# Altium PCB Ada - Sensor - issue 4.0.PcbDoc
Units mm, origin at the board's own origin, x right, y up, seen from the top; angles counter-clockwise.
Board outline 61.85 x 43.35 mm, 2 copper layers (Top Layer, Bottom Layer), stack 1.571 mm thick; 77 components, 51 nets, 205 pads, 67 vias.
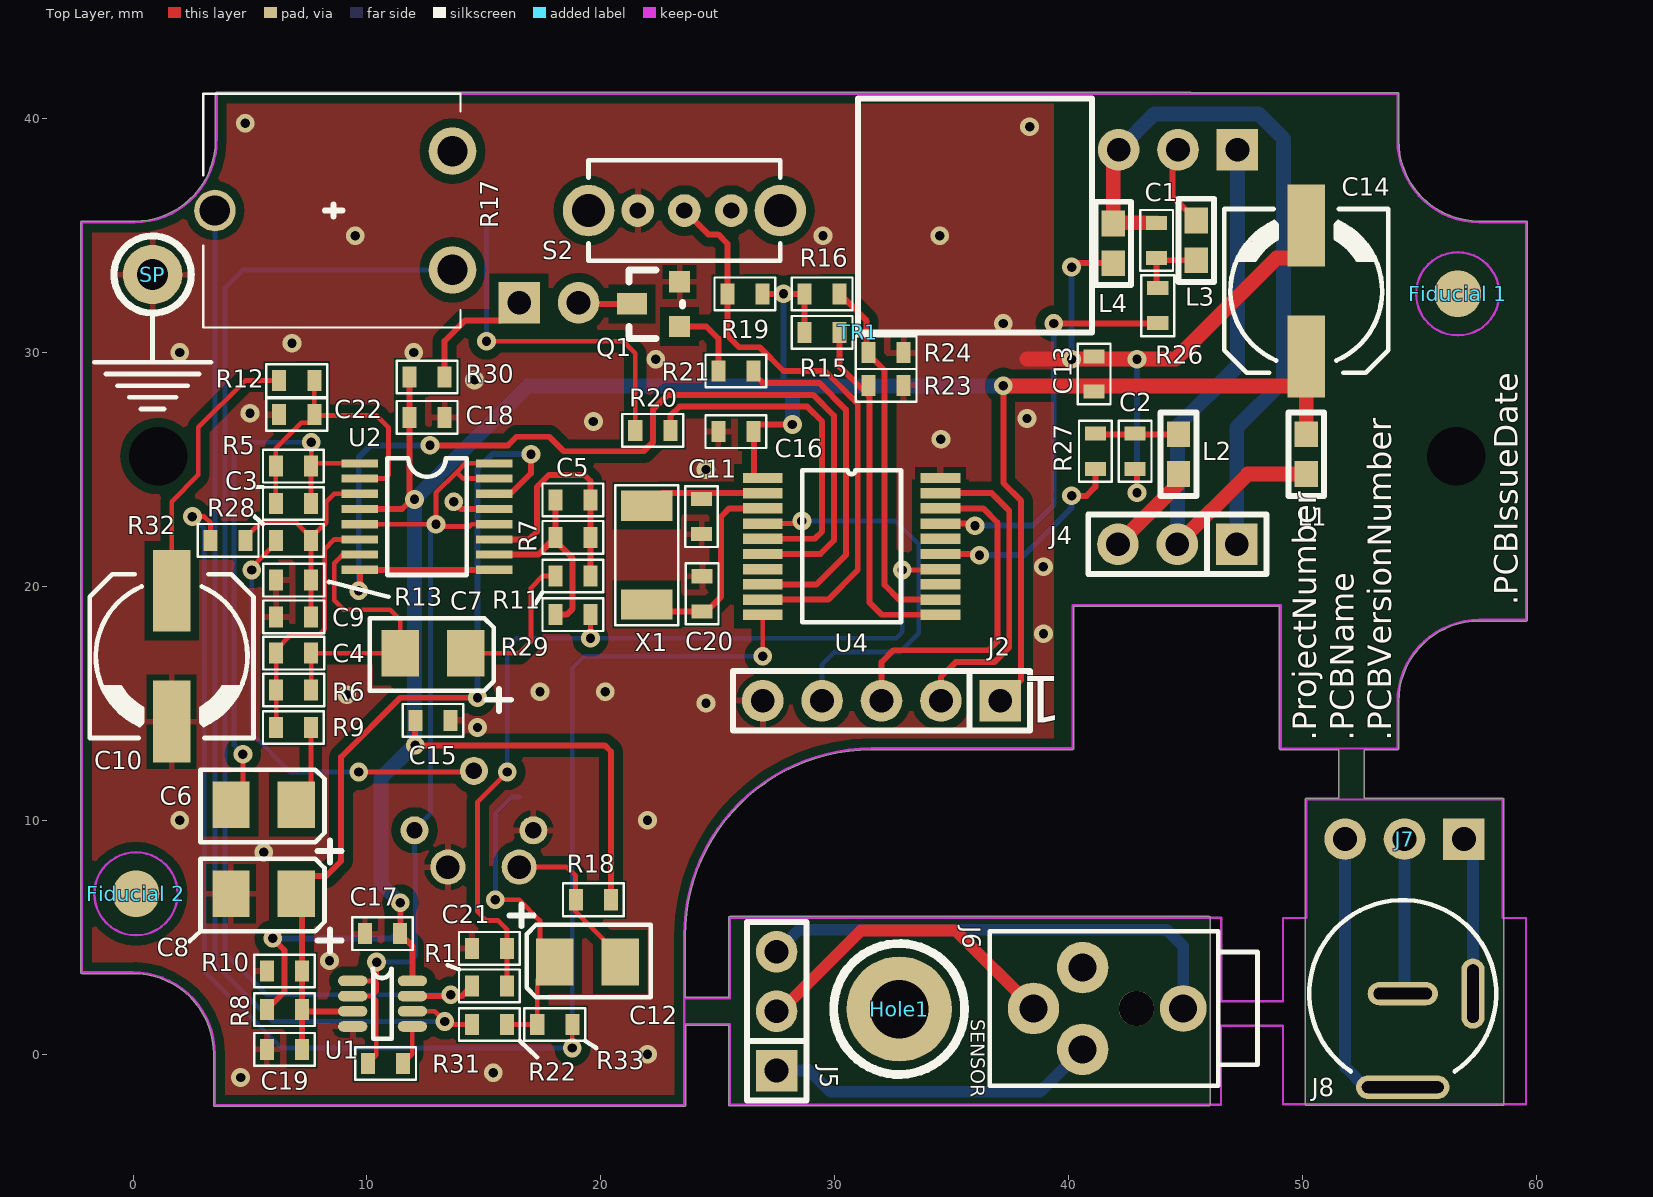
[diagram p0: Top Layer view]
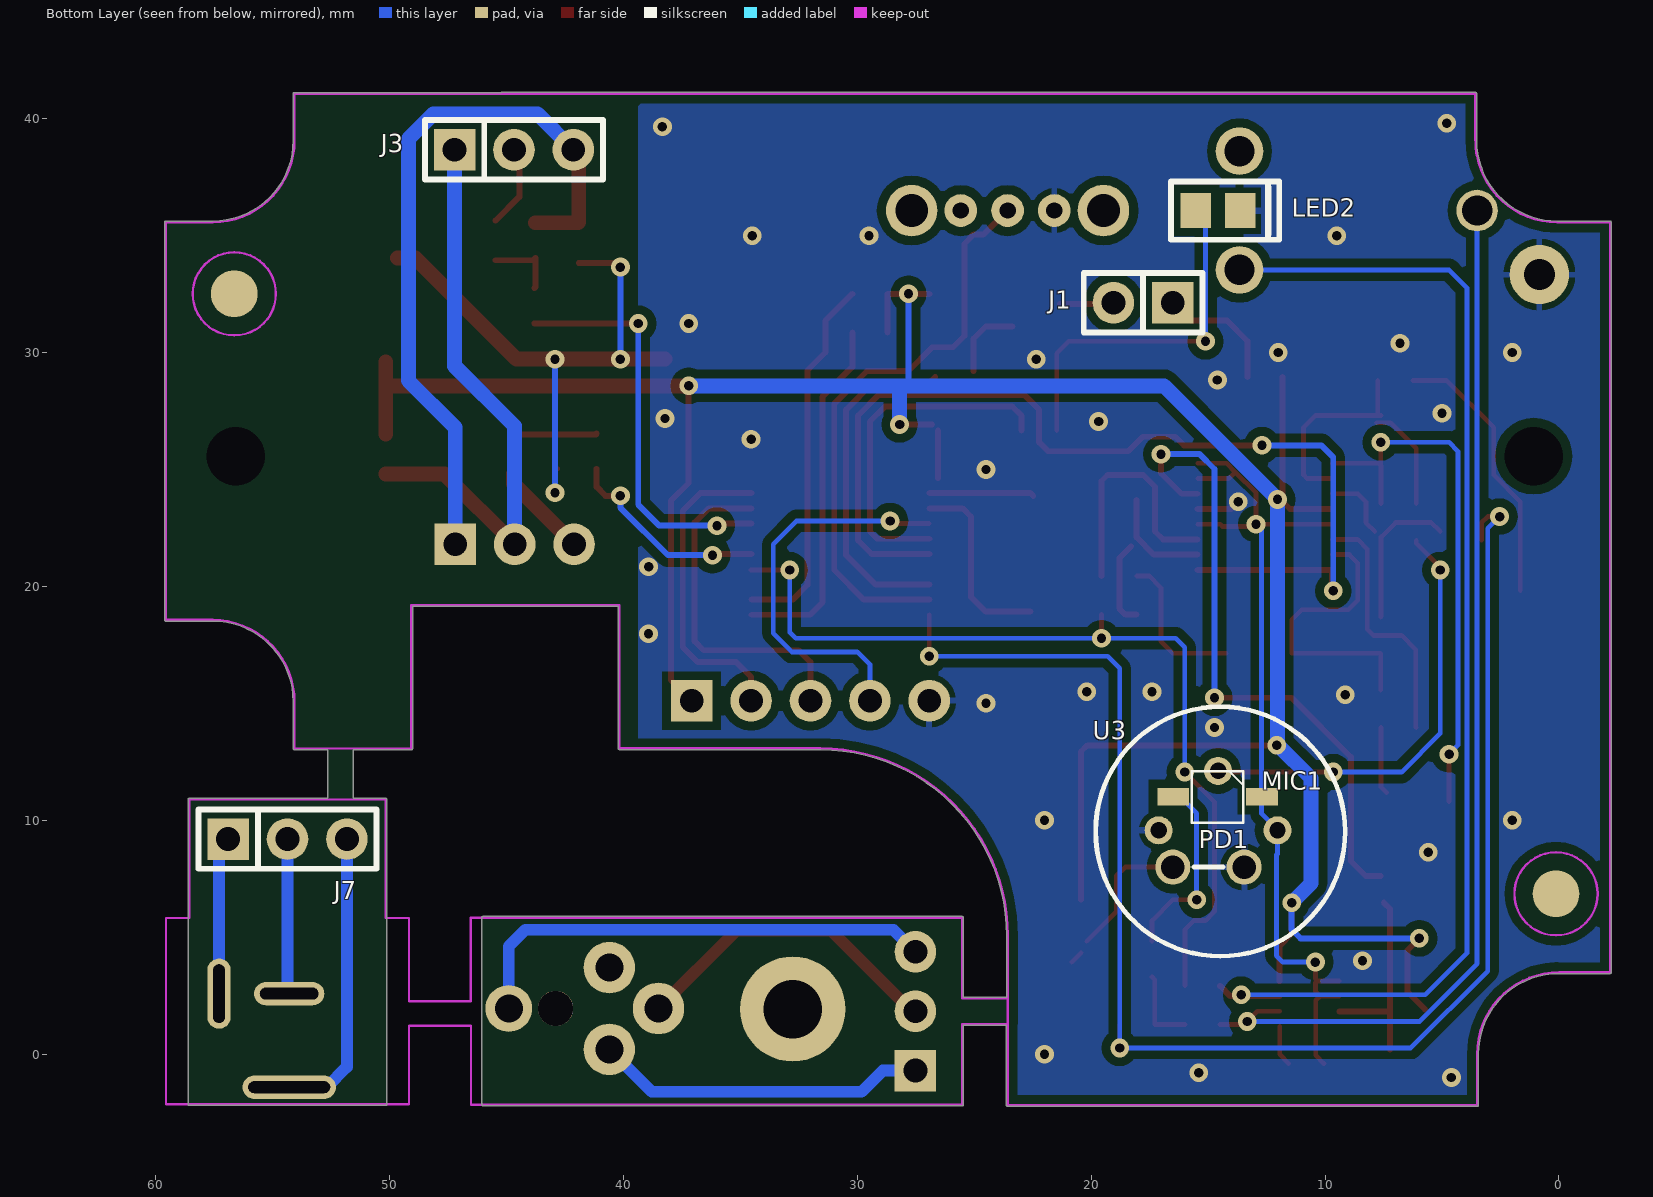
[diagram p1: Bottom Layer view, seen from below]
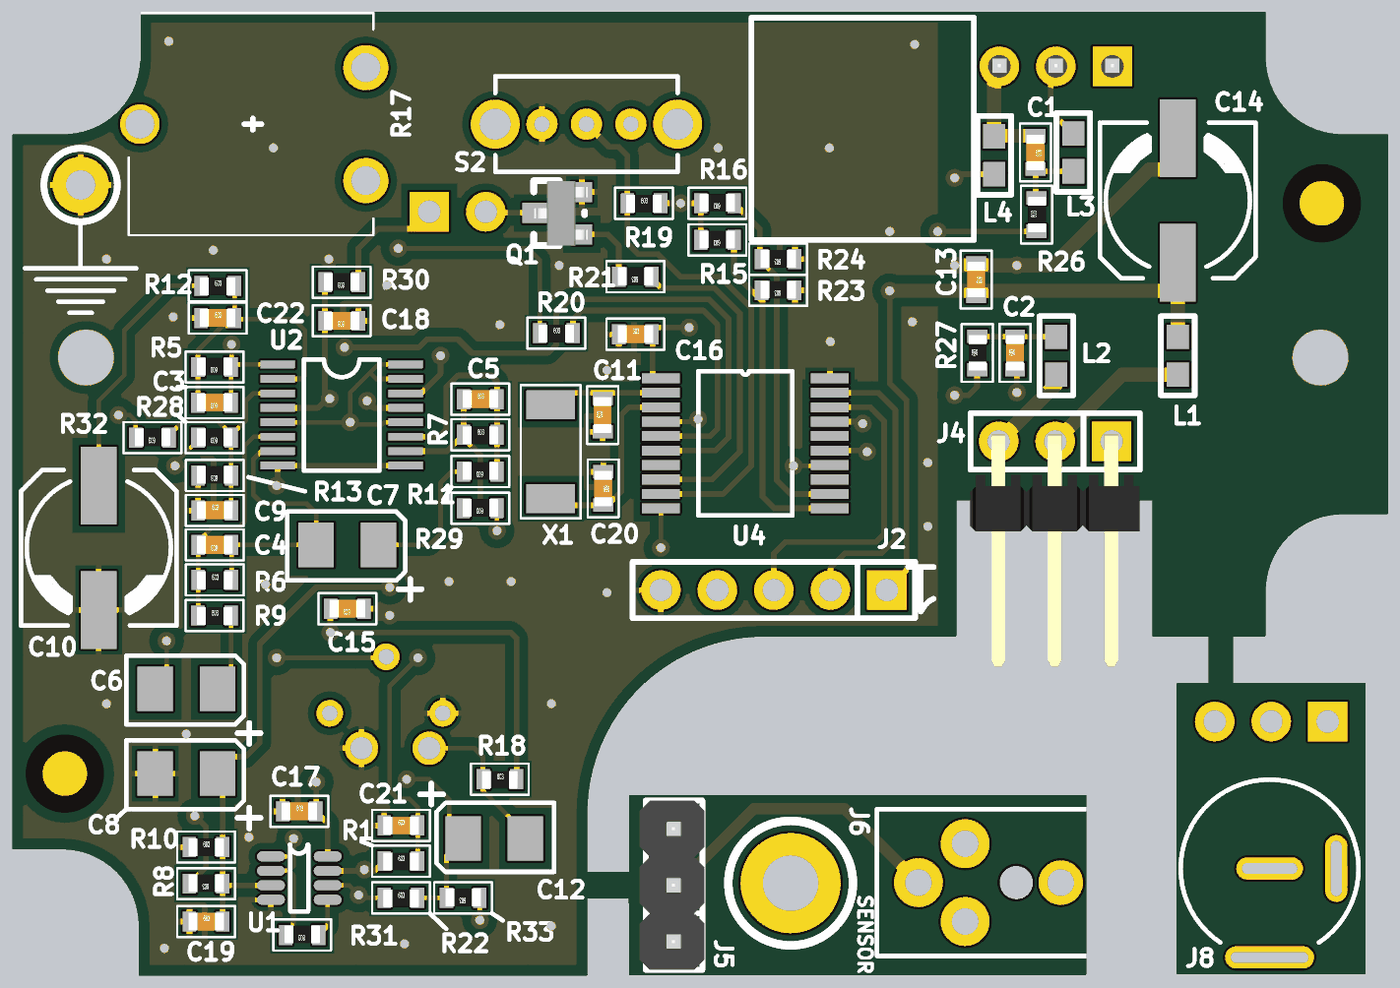
[diagram p2: 3D render of the assembled board from above, using the file's embedded part models]

## Layer stack, top to bottom
Top Solder: solder mask 0.0102, Solder Resist, Dk 3.5
Top Layer: signal copper 0.0356
Dielectric1: dielectric 1.5, FR-4, Dk 4.8
Bottom Layer: signal copper 0.0356
Bottom Solder: solder mask 0.0102, Solder Resist, Dk 3.5

## Board outline
3.45,-2.181 3.45,0 cw(c3.5,0) 3.45,0.001 ccw(c0,0) 0,3.45 -2.181,3.45 cw(c-2.181,3.5) -2.231,3.5 -2.231,35.569 cw(c-2.181,35.569) -2.181,35.62 0.069,35.62 ccw(c0.069,39.069) 3.519,39.069 cw(c3.569,39.069) 3.526,39.096 3.526,41.073 cw(c3.577,41.073) 3.577,41.123 45.206,41.123 cw(c45.206,41.073) 45.225,41.12 54.069,41.12 cw(c54.069,41.069) 54.12,41.069 54.12,39.069 cw(c54.069,39.069) 54.12,39.069 ccw(c57.569,39.069) 57.569,35.62 59.569,35.62 cw(c59.569,35.569) 59.62,35.569 59.62,18.569 cw(c59.569,18.569) 59.569,18.519 57.569,18.519 cw(c57.569,18.569) 57.569,18.519 cw(c57.569,15.069) 57.569,18.519 ccw(c57.569,15.069) 54.12,15.07 cw(c54.069,15.069) 54.12,15.069 54.12,13.069 cw(c54.069,13.069) 54.069,13.019 52.65,13.019 52.65,10.939 58.565,10.939 cw(c58.565,10.889) 58.615,10.889 58.615,-2.143 cw(c58.565,-2.143) 58.565,-2.193 50.2,-2.193 cw(c50.2,-2.143) 50.184,-2.191 cw(c50.168,-2.143) 50.118,-2.143 50.118,10.889 cw(c50.168,10.889) 50.168,10.939 51.55,10.939 51.55,13.019 49.069,13.019 cw(c49.069,13.069) 49.019,13.072 cw(c49.069,13.075) 49.019,13.075 49.019,19.15 40.22,19.15 40.22,13.075 cw(c40.169,13.075) 40.169,13.025 31.593,13.025 cw(c31.569,13.069) 31.569,13.019 ccw(c31.569,5.069) 23.62,5.069 23.62,2.442 25.469,2.442 25.469,5.838 cw(c25.52,5.838) 25.52,5.888 46,5.888 cw(c46,5.838) 46.05,5.838 46.05,-2.162 cw(c46,-2.162) 46,-2.212 25.52,-2.212 cw(c25.52,-2.162) 25.469,-2.162 25.469,1.234 23.624,1.234 23.624,-2.159 cw(c23.577,-2.177) 23.627,-2.177 cw(c23.577,-2.177) 23.577,-2.228 3.518,-2.228 cw(c3.5,-2.181)

## Design rules (kind name [scope] priority, off if disabled: settings)
Clearance Clearance_Plane [InPolygon] p1: gap=0.381 // Clearance to planes
Clearance [OnLayer('Keep-Out Layer') vs IsPad] p2: gap=0.1
Clearance Clearance_1 [All] p3: gap=0.15
ComponentClearance [All] p1 off: gap=0.04 collisioncheckmode=3 verticalgap=0.254 showdistances=FALSE
HoleSize [All] p1: absolutevalues=TRUE maxlimit=6.35 minlimit=0.025 maxpercent=80.000 minpercent=20.000
HoleSize Testpoint [All] p2: absolutevalues=TRUE maxlimit=2.54 minlimit=0.025 maxpercent=80.000 minpercent=20.000
HoleSize TestPointUsage [All] p3: absolutevalues=TRUE maxlimit=2.54 minlimit=0.025 maxpercent=80.000 minpercent=20.000
MinimumSolderMaskSliver [All] p1 off: minsoldermaskwidth=0.076
MinimumSolderMaskSliver SilkscreenOverComponentPads [All] p2 off: minsoldermaskwidth=0.254
PolygonConnect PolygonConnect_Via [IsVia] p1: connectstyle=Direct reliefconductorwidth=0.254 reliefentries=4 polygonreliefangle="90 Angle" airgapwidth=0.254 // Direct connect to vias
PolygonConnect [All] p2: connectstyle=Relief reliefconductorwidth=0.254 reliefentries=4 polygonreliefangle="90 Angle" airgapwidth=0.254
RoutingVias [All] p1: holewidth=0.4 width=0.8 viastyle="Through Hole" minholewidth=0.4 minwidth=0.8 maxholewidth=0.4 maxwidth=0.8
SilkToSilkClearance [All] p1 off: silktosilkclearance=0.254
SilkToSolderMaskClearance [IsPad] p1 off: minsilkscreentomaskgap=0.127 clearancetoexposedcopper=TRUE
SolderMaskExpansion [All] p1: expansion=0.102
UnpouredPolygon [All] p1: allowunpoured=FALSE
Width [All] p1: maxlimit=12.7 minlimit=0.203 preferedwidth=0.254
24 further rules are at their usual default settings.

## Classes and differential pairs
component class "TRI002 daugher board 3.1": J5 J6 J7 J8
component class "TRI002 sensor board issue 3.1": C1 C2 C3 C4 C5 C6 C7 C8 C9 C10 C11 C12 C13 C14 C15 C16 C17 C18 C19 C20 C21 C22 J1 J2 J3 J4 L1 L2 L3 L4 LED2 MIC1 PD1 Q1 R1 R5 R6 R7 R8 R9 R10 R11 R12 R13 R15 R16 R17 R18 R19 R20 R21 R22 R23 R24 R26 R27 R28 R29 R30 R31 R32 R33 S2 U1 U2 U3 U4 X1
component class "TRI002 COVERSHEET 3.1": "Fiducial 1" "Fiducial 2" Mech1 Mech2 SP TR1

## Components (designator, comment, footprint, x,y, rotation, side; value= is the part's Value field where it differs from the comment)
C1 "10nF" C0603 43.815,34.798 r270 top
C2 "10nF" C0603 42.799,25.781 r90 top
C3 "Capacitor 0805" C0603 6.858,23.495 r180 top
C4 "Capacitor 0603" C0603 6.87,17.095 r180 top
C5 "Capacitor 0603" C0603 18.808,23.749 r0 top
C6 "10uF, 16V, case A" CASE_A 5.588,10.668 r180 top
C7 "4.7uF, 16V, case A" CASE_A 12.827,17.145 r180 top
C8 "10uF, 16V, case A" CASE_A 5.588,6.858 r180 top
C9 "Capacitor 0805" C0603 6.87,18.746 r0 top
C10 "47uF, 16V, case D8" CAP6.8/6.8 1.651,17.018 r270 top
C11 "18pF" C0603 24.257,22.987 r90 top
C12 "10uF, 16V, case A" CASE_A 19.431,3.937 r0 top
C13 "100nF, 16V, 0603" C0603 41.148,29.083 r270 top
C14 "47uF, 16V, case D8" CAP6.8/6.8 50.165,32.639 r90 top
C15 "10nF" C0603 12.827,14.224 r180 top
C16 "10nF" C0603 25.781,26.67 r0 top
C17 "100nF, 16V, 0603" C0603 10.668,5.207 r0 top
C18 "100nF, 16V, 0603" C0603 12.573,27.178 r180 top
C19 "100nF, 16V, 0603" C0603 6.477,0.254 r0 top
C20 "18pF" C0603 24.384,19.685 r270 top
C21 "Capacitor 0603" C0603 15.24,4.572 r0 top
C22 "Capacitor 0805" C0603 7,27.4 r0 top
"Fiducial 1" "Fiducial" FMARK 56.642,32.512 r90 top
"Fiducial 2" "Fiducial" FMARK 0.127,6.858 r90 top
Hole1 "3mm Mounting hole" "3mm mounting hole" 32.758,1.931 r0 top
J1 "Laser" SIP2 16.51,32.131 r0 bottom
J2 "ICP" ICP 37.084,15.113 r180 top
J3 "Jack Socket" sip3#1 47.223,38.671 r180 bottom
J4 "Jack Plug" "3 way sip RA" 44.653,21.8 r180 top
J5 "Jack Socket" sip3#1 27.52,-0.702 r90 top
J6 "2.5mm PHONEJACK STEREO TRI001" "2.5MM SOCKET TRI001" 44.904,1.954 r90 top
J7 "Jack Plug" sip3#2 56.906,9.199 r0 top
J8 "Jack Plug" DC_JACK_PCB_MOUNT 54.293,2.589 r180 top
L1 "0R15,1A,220R,0603" L0603 50.165,25.654 r90 top
L2 "0R15,1A,220R,0603" L0603 44.704,25.654 r90 top
L3 "0R15,1A,220R,0603" L0603 45.466,34.798 r270 top
L4 "0R15,1A,220R,0603" L0603 41.913,34.671 r270 top
LED2 "LED GREEN 0805" "LED, GREEN, 0805" 14.577,36.073 r180 bottom
MIC1 "Mic2" ECM 14.986,8.001 r180 bottom
PD1 "PHOTODIODE" "DOME LENS" 14.6,11 r0 bottom
Q1 "FDN335N" SOT-23 23.368,31.115 r90 top
R1 "Resistor 0603" R0603 15.24,2.921 r0 top
R5 "Resistor 0603" R0603 6.858,25.146 r180 top
R6 "Resistor 0603" R0603 6.87,15.571 r0 top
R7 "Resistor 0603" R0603 18.808,22.098 r0 top
R8 "Resistor 0603" R0603 6.477,1.905 r180 top
R9 "Resistor 0603" R0603 6.858,13.97 r0 top
R10 "Resistor 0603" R0603 6.477,3.556 r0 top
R11 "Resistor 0603" R0603 18.808,20.447 r180 top
R12 "Resistor 0603" R0603 7,28.8 r0 top
R13 "Resistor 0805" R0603 6.87,20.27 r180 top
R15 "Resistor 0603" R0603 29.464,30.861 r180 top
R16 "Resistor 0603" R0603 29.464,32.512 r180 top
R17 "1M" "PRESET_ISKRA SQUARE" 3.5,36.073 r270 top
R18 "Resistor 0603" R0603 19.685,6.604 r0 top
R19 "Resistor 0603" R0603 26.162,32.512 r0 top
R20 "Resistor 0603" R0603 22.225,26.67 r0 top
R21 "Resistor 0603" R0603 25.781,29.21 r180 top
R22 "Resistor 0603" R0603 15.24,1.27 r0 top
R23 "Resistor 0603" R0603 32.2,28.6 r180 top
R24 "Resistor 0603" R0603 32.2,30 r180 top
R26 "Resistor 0603" R0603 43.815,32.004 r90 top
R27 "Resistor 0603" R0603 41.148,25.781 r90 top
R28 "Resistor 0603" R0603 6.858,21.971 r180 top
R29 "Resistor 0603" R0603 18.808,18.796 r180 top
R30 "Resistor 0603" R0603 12.573,28.956 r180 top
R31 "Resistor 0603" R0603 10.8,-0.4 r180 top
R32 "Resistor 0603" R0603 4.064,21.971 r180 top
R33 "Resistor 0603" R0603 18.034,1.27 r180 top
S2 "SW SPST" MFP113D 23.577,36.073 r0 top
SP "Scope GND point" "Scope GND point" 0.836,33.336 r0 top
TR1 "trace label" TraceLabel 31,30.861 r0 top
U1 "TSV6292AILT" "SOT23 8 pin" 10.668,2.159 r0 top
U2 "TSV6295IPT" TSSOP16 12.573,22.987 r0 top
U3 "LHI_968" PIR_TO-5 14.577,9.573 r180 bottom
U4 "PIC16F527-I/SS" SSOP20 26.924,24.638 r0 top
X1 "XTAL SMD 2pin" ABS10 21.971,21.336 r270 top

## Footprints (in the part's own frame and the unit in brackets; to place one, negate y for a bottom-side part, rotate by r counter-clockwise, add the part's x,y. Pads: shape width x height; smd on the part's side, far side on the other; paste and mask are expansions set on the pad)
"2.5MM SOCKET TRI001" [mm]
  round 1.5 hole 1.5 unplated: 0(0,2)
  round 2 hole 1.2: 1(0,0)
  round 2.2 hole 1.2: 2(-1.75,4.3) 3(1.75,4.3) 4(0,6.4)
  silkscreen extent -3.3,-3.18 3.3,8.27, body extent -2.5,-4.2 2.5,6.6, height 5
"3 way sip RA" [mil]
  rect 70x70 hole 40: 1(-100,0)
  round 70 hole 40: 2(0,0) 3(100,0)
  silkscreen extent -150,-50 150,50, body extent -149,-13 151,399, height 122
"3mm mounting hole" [mm]
  round 4.5 hole 2.5: 1(0,0)
  silkscreen extent -2.8,-2.8 2.8,2.8
ABS10 [mm] "Crystal SMT"
  rect 1.3x2.2 smd: 1(-2.108,0) 2(2.108,0)
  silkscreen extent -3,-1.35 3,1.35, body extent -2.5,-1 2.6,1, height 2
C0603 [mm] "Chip Capacitor; Body 1.6 x 0.8 mm (LxW typ)"
  rect 0.6x0.9 smd: 1(-0.75,-0.05) 2(0.75,-0.05)
  silkscreen extent -1.3,-0.75 1.3,0.65, body extent -0.8,-0.45 0.8,0.35, height 0.3
CAP6.8/6.8 [mm]
  rect 3.5x1.6 smd: 1(-2.8,0) 2(2.8,0)
  silkscreen extent -3.5,-3.5 3.5,3.5, body extent -3.3,-3.3 3.3,3.3, height 5.4
CASE_A [mm]
  rect 1.6x2 smd: 1(-1.4,0) 2(1.4,0)
  silkscreen extent -3.34,-1.5 2.7,2.47, body extent -2,-1.48 1.93,1.6, height 2.5
DC_JACK_PCB_MOUNT [mm]
  rrect100% 1x3 hole 0.5 slot 2.5 at 90 deg: 1(-3,0)
  rrect100% 3x1 hole 0.5 slot 2.5 at 0 deg: 2(0,0)
  oval 4x1 hole 0.5 slot 3.5 at 0 deg: 3(0,4)
  silkscreen extent -4,-4 4,3.33, body extent -3.97,-3.99 4,3.99, height 17.6
"DOME LENS" [mm]
  rect 1.35x0.75 smd: A(1.9,0) K(-1.9,0)
  silkscreen extent -1.1,-1.1 1.1,1.1
ECM [mm]
  round 1.5 hole 1: 1(-1.524,0) 2(1.524,0)
FMARK [mm]
  round 2 all layers, no hole mask+0.762: 0(0,0)
  Keep-Out Layer circle w0.1: c0,0 r1.778
ICP [mil] "ICP"
  rect 70x70 hole 40: 1(0,0)
  round 70 hole 40: 2(100,0) 3(200,0) 4(300,0) 5(400,0)
  silkscreen extent -50,-50 450,50
L0603 [mm] "INDUCTOR"
  rect 1.1x1 smd: 1(-0.85,0) 2(0.85,0)
  silkscreen extent -1.78,-0.76 1.78,0.76, body extent -1.5,-0.6 1.5,0.6, height 1
"LED, GREEN, 0805" [mm] "LED GREEN"
  rect 1.3x1.5 smd: A(-0.956,0) K(0.944,0)
  silkscreen extent -2.01,-1.25 2.62,1.25, body extent -1.7,-0.85 1.7,0.85, height 1
MFP113D [mm]
  round 2.2 hole 1.4: 0(-4.1,0) 0(4.1,0)
  round 1.4 hole 0.7: 1(-2,0) 2(0,0) 3(2,0)
  silkscreen extent -4.1,-2.15 4.1,2.15, body extent -4.1,-2.15 4.1,2.15, height 8.7
PIR_TO-5 [mm]
  round 1.2 hole 0.7: 1(2.54,0) 2(0,2.54) 3(-2.54,0)
  body extent -5.09,-5.09 5.09,5.09, height 4.2
"PRESET_ISKRA SQUARE" [mil]
  round 80 hole 51.18: 1(-100,400) 2(100,400)
  round 70 hole 51.18: W(0,0)
  silkscreen extent -197,-20 197,413, body extent -197,-20 197,413, height 618
R0603 [mm] "Chip Capacitor; Body 1.6 x 0.8 mm (LxW typ)"
  rect 0.6x0.9 smd: 1(-0.75,0) 2(0.75,0)
  silkscreen extent -1.3,-0.7 1.3,0.7, body extent -0.8,-0.42 0.8,0.38, height 0.3
"Scope GND point" [mil]
  round 100 hole 52: 1(0,0)
  silkscreen extent -98,-226 98,65
SIP2 [mil]
  rect 70x70 hole 40: 1(0,0)
  round 70 hole 40: 2(100,0)
  silkscreen extent -50,-50 150,50
sip3#1 [mil]
  rect 70x70 hole 40: 1(0,0)
  round 70 hole 40: 2(100,0) 3(200,0)
  silkscreen extent -50,-50 250,50, body extent -50,-54 250,61, height 336
sip3#2 [mil]
  rect 70x70 hole 40: 1(0,0)
  round 70 hole 40: 2(-100,0) 3(-200,0)
"SOT23 8 pin" [mm]
  oval 1.25x0.45 smd: 1(-1.275,0.975) 2(-1.275,0.325) 3(-1.275,-0.325) 4(-1.275,-0.975) 5(1.275,-0.975) 6(1.275,-0.325) 7(1.275,0.325) 8(1.275,0.975)
  silkscreen extent -0.43,-1.5 0.4,1.5, body extent -0.87,-1.5 0.88,1.5, height 1.3
SOT-23 [mil] "FET"
  rect 36x50 smd: D(38,80)
  rect 36x36 smd: G(0,0) S(75,0)
  silkscreen extent -20,-5 95,85, body extent -20,-11 94,84, height 39
SSOP20 [mm]
  rect 1.7x0.445 smd: 1(0,0) 2(0,-0.65) 3(0,-1.3) 4(0,-1.95) 5(0,-2.6) 6(0,-3.25) 7(0,-3.9) 8(0,-4.55) 9(0,-5.2) 10(0,-5.85) 11(7.6,-5.85) 12(7.6,-5.2) 13(7.6,-4.55) 14(7.6,-3.9) 15(7.6,-3.25) 16(7.6,-2.6) 17(7.6,-1.95) 18(7.6,-1.3) 19(7.6,-0.65) 20(7.6,0)
  silkscreen extent 1.68,-6.18 5.91,0.32, body extent 1.68,-6.18 5.91,0.32, height 2
TraceLabel [mm]
  silkscreen extent 0,0 10,10
TSSOP16 [mm]
  rect 1.55x0.35 smd: 1(-2.875,2.275) 2(-2.875,1.625) 3(-2.875,0.975) 4(-2.875,0.325) 5(-2.875,-0.325) 6(-2.875,-0.975) 7(-2.875,-1.625) 8(-2.875,-2.275) 9(2.875,-2.275) 10(2.875,-1.625) 11(2.875,-0.975) 12(2.875,-0.325) 13(2.875,0.325) 14(2.875,0.975) 15(2.875,1.625) 16(2.875,2.275)
  silkscreen extent -1.7,-2.5 1.7,2.5, body extent -2.2,-2.5 2.2,2.5, height 1.2

## Part data
C1 C2 C15 C16: library part "10nF, 50V, 0603", "Ceramic"
C3 C4 C5 C9 C13 C17 C18 C19 C21 C22: "Ceramic"
C6 C8 C10 C12 C14: library part "47uF, 25V, case D8", "ELECTROLYTIC"
C7: library part "47uF, 25V, case D8", "TANT"
C11 C20: library part "18pF, 50V, 0603", "Ceramic"
"Fiducial 1" "Fiducial 2": library part "F Mark"
J1: library part "Header 2", "Header, 2-Pin"
J2: "PIC IN CIRCUIT PROGRAMMING HEADER"
J3 J4 J5 J7 J8: library part "Header 3", "Header, 3-Pin"
J6: "2.5mm PHONEJACK STEREO"
L1 L2 L3 L4: "FERRITE BEAD"
LED2: "MULTICOMP"
MIC1: "PROJECTS UNLIMITED - AOM-4542P-R - MICROPHONE, OMNI PCB, 9.7MM"
PD1: "DIODE, PIN, SMD, DOME LENS"
R17: library part POT2, "1m Pnz10za Preset Potentiometer"
SP: "Scope probe earth point"
U1 U2: "low power Op Amp"
U3: "PIR detector"
U4: library part PIC16F527, "8bit uProcessor"
X1: "CRYSTAL, 16MHZ, 18PF CL, 5X3.2MM, SMT"

## Free pads (board coordinates)
  round 1 hole 2.5: 0(1.077,25.573) 1(56.577,25.573)

## Via types
v1: diameter 0.8, hole 0.4, Top Layer to Bottom Layer, tented both sides, 67 vias

## Nets (pads, with @x,y where several pads share a name; then routed paths per layer and width w, separated by ;. In a path a pad name is that pad's centre, name@x,y a point inside that pad or via, vN(x,y) a via of type N, cw(c..) or ccw(c..) an arc to the next point about the centre after c; other vN are vias at no path point)
ANA_TRIG: C21.2 R1.2 R29.1 U4.14 | length 38.3
  Top Layer w0.203: R1.2 C21.2 15.99,5.346 15.621,5.715 15.113,5.715 14.732,6.096 14.732,10.795 v1(16.002,12.065) ; v1(19.558,17.78) R29.1 ; v1(32.893,20.701) U4.14@34.544,20.701
  Bottom Layer w0.203: v1(16.002,12.065) 16.002,17.399 16.383,17.78 v1(19.558,17.78) 32.639,17.78 32.893,18.034 v1(32.893,20.701)
CLK: J2.3 U4.18 | length 14.7
  Top Layer w0.254: J2.3 32.004,16.764 32.512,17.272 36.576,17.272 36.957,17.653 36.957,22.733 36.352,23.338 U4.18
DATA: J2.2 U4.19 | length 13.6
  Top Layer w0.254: U4.19 36.718,23.988 37.465,23.241 37.465,17.526 37.465,17.399 36.83,16.764 35.179,16.764 34.544,16.129 J2.2
GND: C2.1 C8.2 C9.1 C10.2 C11.1 C13.1 C14.2 C15.1 C16.1 C17.1 C18.1 C19.1 C20.1 C21.1 C22.1 J2.5 L4.2 LED2.K MIC1.2 Q1.S R10.1 R13.2 R23.1 R24.1 S2.1 SP.1 U1.4 U2.13 U3.3 U4.20 | length 27.8
  Top Layer w0.254: v1(13.716,23.622) 14.026,23.312 U2.13 ; v1(40.132,33.655) 40.132,33.821 L4.2 ; C2.1 42.926,25.031 v1(42.926,24.003)
  Top Layer w0.635: 38.227,29.718 v1(40.132,29.718) 44.577,29.718 48.895,34.036 C14.2@49.657,34.036
  Bottom Layer w0.254: v1(40.132,29.718) v1(40.132,33.655) ; v1(42.926,24.003) v1(42.926,29.718)
  other v1: 4.6,-1 15.4,-0.8 22,0 8.4,4 5.588,8.636 2,10 22,10 14.732,13.97 24.5,15 9.144,15.367 17.399,15.494 20.193,15.494 38.93,17.982 38.926,20.844 24.5,25 34.544,26.289 19.685,27.051 38.227,27.178 5,27.4 14.605,28.829 22.352,29.718 2,30 12,30 6.8,30.4 37.211,31.242 9.5,35 29.5,35 34.5,35 38.336,39.657 4.8,39.8
LASER: R21.1 U4.8 | length 14.7
  Top Layer w0.254: R21.1@26.67,28.956 26.924,28.702 28.321,28.702 29.337,28.702 30.48,27.559 30.48,21.336 29.232,20.088 U4.8
LED: R20.2 U4.5 | length 14.9
  Top Layer w0.254: R20.2 22.975,27.293 23.368,27.686 28.829,27.686 29.464,27.051 29.464,25.781 29.464,22.352 29.15,22.038 U4.5
MCLR: J2.4 U4.4 | length 17.2
  Top Layer w0.203: U4.4 28.488,22.688 v1(28.6,22.8)
  Bottom Layer w0.203: v1(28.6,22.8) 32.6,22.8 33.6,21.8 33.6,18 32.8,17.2 30,17.2 29.464,16.664 J2.4
NetC1_1: C1.1 J3.3 J4.1 L4.1 | length 31.3
  Top Layer w0.635: J3.3@41.913,38.671 41.913,35.575 41.94,35.548 C1.1
  Bottom Layer w0.635: J3.3 43.672,40.2 48.133,40.2 49.2,39.133 49.2,28.8 47.193,26.793 J4.1
NetC1_2: C1.2 L3.2 R26.2 | length 3.1
  Top Layer w0.254: R26.2 43.765,32.804 C1.2 43.865,33.948 L3.2
NetC2_2: C2.2 L2.2 R27.2 | length 3.6
  Top Layer w0.254: R27.2 41.175,26.504 L2.2
NetC3_1: C3.1 C6.2 R5.1 U2.1 | length 23.6
  Top Layer w0.203: C6.2@4.699,10.795 v1(4.699,12.827) ; C3.1 R5.1 ; R5.1@7.62,25.146 R5.1@7.62,25.158 ; v1@7.62,26.416 v1(7.62,26.162) R5.1@7.62,25.158 ; U2.1 7.724,25.262 R5.1@7.62,25.158
  Bottom Layer w0.203: v1(4.699,12.827) 4.318,13.208 4.318,25.781 4.699,26.162 v1(7.62,26.162)
NetC3_2: C3.2 C22.2 R5.2 R12.2 U2.2 | length 12.9
  Top Layer w0.203: C3.2 R5.2 6.108,25.908 7.2,27 C22.2@7.8,27 ; C22.2@7.608,27.305 C22.2@7.705,27.305 ; R12.2 C22.2 C22.2@7.705,27.305 ; U2.2 10.769,24.612 10.922,24.765 10.922,26.797 10.414,27.305 C22.2@7.705,27.305
NetC4_1: C4.1 C7.2 R6.2 U2.7 | length 12.8
  Top Layer w0.203: R6.2 C4.1 C7.2 11.427,18.573 11,19 9,19 8.6,19.4 8.6,21 8.962,21.362 U2.7
NetC4_2: C4.2 R6.1 R9.1 U2.6 | length 10.9
  Top Layer w0.203: R9.1 6.12,13.982 R6.1 C4.2 6.12,17.296 6.731,17.907 7.937,17.907 8.2,18.17 8.2,21.6 8.612,22.012 U2.6
NetC5_1: C5.1 R7.1 R29.2 U2.10 | length 8.2
  Top Layer w0.254: U2.10 17.322,21.362 R7.1 C5.1 ; R29.2 18.542,18.796 18.796,19.05 18.796,21.209 R7.1@18.288,21.717
NetC5_2: C5.2 R7.2 R11.1 U2.11 | length 10.5
  Top Layer w0.254: U2.11 16.932,22.012 17.272,22.352 17.272,24.257 17.78,24.765 19.304,24.765 19.558,24.511 C5.2 R7.2 R11.1
NetC6_1: C6.1 R9.2 | length 2.9
  Top Layer w0.203: C6.1@7.366,11.176 7.608,11.418 R9.2
NetC7_1: C7.1 R11.2 | length 6.5
  Top Layer w0.203: C7.1 16.51,17.145 17.018,17.653 17.018,19.939 17.526,20.447 R11.2
NetC8_1: C8.1 C19.2 R8.1 R10.2 U1.3 U2.14 | length 36.5
  Top Layer w0.254: C19.2 R8.1 ; C8.1@7.493,6.477 7.227,6.211 R10.2 R8.1 ; C8.1@7.62,7.62 8.255,7.62 8.89,8.255 8.89,12.7 11.43,15.24 v1(14.732,15.24) ; U1.3 7.298,1.834 R8.1 ; U2.14 16.143,23.962 17.018,24.837 v1(17.018,25.654)
  Bottom Layer w0.254: v1(14.732,15.24) 14.732,25.019 15.367,25.654 v1(17.018,25.654)
NetC9_2: C9.2 R13.1 R28.1 R32.1 U2.3 | length 9.4
  Top Layer w0.203: R32.1@5.08,22.352 5.461,22.733 6.985,22.733 7.608,22.11 R28.1 7.608,18.708 C9.2 ; R28.1@7.874,22.352 8.255,22.733 8.255,23.622 8.595,23.962 U2.3
NetC10_1: C10.1 R12.1 | length 11.7
  Top Layer w0.203: C10.1 1.651,23.622 2.794,24.765 2.794,26.797 4.797,28.8 R12.1
NetC12_1: C12.1 PD1.A R22.2 R33.2 | length 11.5
  Top Layer w0.203: v1(15.494,6.604) 16.51,6.604 17.399,5.715 C12.1@17.399,4.826 ; R22.2 R33.2 17.284,3.187 C12.1@17.399,3.302
  Bottom Layer w0.203: v1(15.494,6.604) 15.494,10.294 16.2,11 PD1.A
NetC12_2: C12.2 MIC1.1 R18.1 | length 6.5
  Top Layer w0.203: MIC1.1 18.542,8.001 18.923,7.62 18.923,6.477 18.923,6.096 C12.2@20.193,4.826 ; C12.2@20.435,4.333 C12.2
NetJ1_1: J1.1 R30.1 | length 5.4
  Top Layer w0.254: R30.1 13.323,30.498 14.19,31.365 15.744,31.365 J1.1
NetJ1_2: J1.2 Q1.D | length 2.3
  Top Layer w0.254: J1.2 19.101,32.08 Q1.D
NetJ3_1: J3.1 J4.2 L1.1 | length 24.7
  Top Layer w0.635: J4.2 47.657,24.804 L1.1
  Bottom Layer w0.635: J4.2 44.653,26.853 47.223,29.423 J3.1
NetJ3_2: J3.2 L3.1 | length 3.4
  Top Layer w0.254: J3.2@44.453,38.671 44.453,36.661 L3.1
NetJ4_3: J4.3 L2.1 | length 4.1
  Top Layer w0.635: J4.3 44.704,24.391 L2.1
NetJ5_1: J5.1 J6.2 | length 14.2
  Bottom Layer w0.508: J5.1 28.913,-0.702 29.82,-1.609 38.79,-1.609 J6.2
NetJ5_2: J5.2 J6.4 | length 13.8
  Top Layer w0.508: J5.2@27.666,1.838 31.115,5.286 35.172,5.286 J6.4
  Bottom Layer w0.508: J5.2 J5.2@27.666,1.838
NetJ5_3: J5.3 J6.1 | length 20.7
  Bottom Layer w0.508: J5.3 28.46,5.319 44.192,5.319 44.904,4.607 J6.1
NetJ7_1: J7.1 J8.1 | length 6.8
  Bottom Layer w0.508: J7.1 57.293,8.812 J8.1
NetJ7_2: J7.2 J8.2 | length 6.6
  Bottom Layer w0.508: J8.2 54.366,2.662 J7.2
NetJ7_3: J7.3 J8.3 | length 12.6
  Bottom Layer w0.508: J7.3 51.826,-0.544 52.693,-1.411 J8.3
NetLED2_A: LED2.A R20.1 | length 14.8
  Top Layer w0.203: v1(15.113,30.48) 20.955,30.48 21.475,29.96 R20.1
  Bottom Layer w0.203: v1(15.113,30.48) LED2.A@15.113,35.433
NetQ1_G: Q1.G R21.2 | length 3.3
  Top Layer w0.254: Q1.G 24.511,31.115 25.031,30.595 R21.2
NetR1_1: R1.1 R17.2 U1.7 | length 51.6
  Top Layer w0.254: U1.7 14.053,2.484 R1.1
  Bottom Layer w0.203: v1(13.589,2.54) 5.715,2.54 3.937,4.318 3.937,5.207 3.937,32.766 4.704,33.533 R17.2
NetR15_1: R15.1 R23.2 U4.11 | length 15.3
  Top Layer w0.254: R15.1 30.214,29.386 31.496,28.104 31.496,19.304 32.012,18.788 U4.11
NetR16_1: R16.1 R24.2 U4.12 | length 15.9
  Top Layer w0.254: R16.1 31.369,31.357 31.369,30 32.131,29.238 32.131,20.066 32.759,19.438 U4.12
NetR17_W: R17.W R22.1 U1.6 | length 45.8
  Top Layer w0.203: U1.6 12.898,1.834 v1(13.335,1.397) 13.462,1.27 R22.1
  Bottom Layer w0.203: R17.W 3.5,4.572 3.5,3.866 5.969,1.397 v1(13.335,1.397)
NetR28_2: R28.2 U3.2 | length 18.9
  Top Layer w0.203: v1@4.953,20.701 6.108,21.856 R28.2 ; v1(9.652,12.065) 14.529,12.065 U3.2
  Bottom Layer w0.203: v1(5.08,20.701) 5.08,13.716 6.731,12.065 v1(9.652,12.065)
NetR31_1: R31.1 U1.5 | length 1.7
  Top Layer w0.203: R31.1 11.943,-0.007 U1.5
OSC1: C11.2 U4.2 X1.1 | length 4.5
  Top Layer w0.254: X1.1@22.479,23.876 22.591,23.988 U4.2
OSC2: C20.2 U4.3 X1.2 | length 8.2
  Top Layer w0.254: X1.2@22.606,18.923 24.511,18.923 25.146,19.558 25.146,22.987 25.497,23.338 U4.3
SHDN_B: U2.8 U2.9 U4.6 | length 44.1
  Top Layer w0.254: v1(9.652,19.812) 9.698,19.858 U2.8 U2.9 ; v1(12.7,26.035) 16.035,26.035 16.4,26.4 17.8,26.4 18.419,25.781 21.844,25.781 22.225,26.162 22.225,27.559 22.86,28.194 29.083,28.194 29.972,27.305 29.972,21.971 29.389,21.388 U4.6
  Bottom Layer w0.254: v1(9.652,19.812) 9.652,25.527 10.16,26.035 v1(12.7,26.035)
STACK_IN: R26.1 U4.17 | length 17.5
  Top Layer w0.254: U4.17 35.912,22.688 v1(36,22.6) ; v1(39.37,31.242) 43.803,31.242 R26.1
  Bottom Layer w0.254: v1(36,22.6) 38.475,22.6 39.37,23.495 v1(39.37,31.242)
STACK_OUT: R27.1 U4.15 | length 8.9
  Top Layer w0.254: U4.15 36.143,21.388 v1(36.195,21.336) ; v1(40.132,23.876) 40.767,23.876 41.148,24.257 R27.1
  Bottom Layer w0.254: v1(36.195,21.336) 38.1,21.336 40.132,23.368 v1(40.132,23.876)
SW1: R19.1 S2.2 U4.9 | length 24.8
  Top Layer w0.254: S2.2 24.597,35.052 25.019,35.052 25.419,34.652 25.419,30.715 25.908,30.226 26.797,30.226 27.813,29.21 29.591,29.21 30.988,27.813 30.988,20.701 29.725,19.438 U4.9
TEST: R32.2 R33.1 U4.10 | length 65.7
  Top Layer w0.203: v1(2.54,22.987) 3.048,22.987 3.314,22.721 R32.2 ; v1(18.784,0.266) R33.1 ; v1(26.924,17.018) U4.10
  Bottom Layer w0.203: v1(2.54,22.987) 3.048,22.479 3.048,19.812 3.048,3.556 6.338,0.266 v1(18.784,0.266) 18.784,16.129 18.784,16.498 19.304,17.018 20.32,17.018 v1(26.924,17.018)
VCC: C13.2 C14.1 C15.2 C16.2 C17.2 C18.2 J2.1 L1.2 R8.2 R15.2 R16.2 R18.2 R19.2 R30.2 U1.8 U2.4 U4.1 | length 125.4
  Top Layer w0.254: R8.2 5.727,1.917 6.477,2.667 6.477,4.445 v1(5.969,4.953) ; U2.4 11.501,23.312 v1@11.823,23.634 ; v1(11.43,6.477) 11.43,5.169 C17.2 11.943,4.632 U1.8 ; R30.2 C18.2 11.823,23.934 v1(12.037,23.721) ; C15.2 12.065,14.262 v1(12.065,13.208) 20.169,13.208 20.435,12.942 R18.2 ; U4.1@26.543,24.638 C16.2@26.543,26.67 ; C16.2@26.797,26.924 v1@28.156,26.924 ; R19.2 v1(27.813,32.512) R16.2 R15.2 ; J2.1 37.973,16.002 37.973,23.661 37.211,24.423 v1(37.211,28.575)
  Top Layer w0.635: v1(37.211,28.575) C14.1@50.165,28.575 ; L1.2 C14.1@50.165,28.575 ; C14.1@50.165,29.591 C14.1@50.165,28.575
  Bottom Layer w0.254: v1(5.969,4.953) 11.049,4.953 11.43,5.334 v1(11.43,6.477) ; 27.813,28.575 v1(27.813,32.512)
  Bottom Layer w0.635: v1(11.43,6.477) 10.6,7.307 10.6,11.8 12.037,13.237 v1(12.037,23.721) 16.891,28.575 27.813,28.575 28.194,28.575 ; v1(28.194,26.924) 28.194,28.575 ; v1(37.211,28.575) 28.194,28.575
VDD/2: PD1.K R31.2 U1.1 U1.2 U2.5 U2.12 U2.15 U2.16 U3.1 | length 38.9
  Top Layer w0.203: U1.2 10.216,2.484 ; U1.1 10.328,3.134 ; U2.5 v1(12.954,22.662) 12.954,24.003 13.843,24.892 ; R31.2 10.4,-0.05 10.4,2.3 10.216,2.484 ; v1(10.414,3.937) 10.414,3.22 10.328,3.134 ; v1@12.993,22.564 14.384,22.564 14.482,22.662 U2.12 ; U2.15 14.123,24.612 13.843,24.892 ; U2.16 14.213,25.262 13.843,24.892 ; 10.216,2.484 10.414,2.682 10.414,3.048 10.328,3.134
  Bottom Layer w0.203: v1(10.414,3.937) 11.811,3.937 12.082,4.208 12.082,8.518 12.037,8.563 12.037,9.6 12.717,10.28 12.717,22.425 v1(12.954,22.662)
pads on no net: "Fiducial 1.0" "Fiducial 2.0" Hole1.1 J6.0 J6.3 R17.1 S2.0 S2.3 U4.7 U4.13 U4.16

## Polygon pours and split planes (outlines as drawn)
GND on Top Layer "Top Layer-No Net" (solid, remove dead copper, pour order 4): 3.45,-2.181 ccw(c3.5,-2.181) 3.518,-2.228 23.551,-2.228 ccw(c23.569,-2.181) 23.594,-2.225 ccw(c23.577,-2.177) 23.627,-2.177 ccw(c23.577,-2.177) 23.62,-2.151 23.62,5.069 cw(c31.569,5.069) 31.569,13.019 ccw(c31.569,13.069) 31.593,13.025 40.169,13.025 ccw(c40.169,13.075) 40.22,13.075 40.22,17.275 44.019,17.275 44.019,11.05 40.575,11.05 ccw(c40.575,11) 40.525,11 40.525,5.987 39.575,5.987 ccw(c39.575,5.936) 39.525,5.936 39.525,-1.45 ccw(c39.575,-1.45) 39.575,-1.5 49.971,-1.5 ccw(c49.971,-1.45) 50.022,-1.45 50.022,5.936 ccw(c49.971,5.936) 49.971,5.987 49.022,5.987 49.022,11 ccw(c48.971,11) 48.971,11.05 45.12,11.05 45.12,17.275 49.019,17.275 49.019,13.075 ccw(c49.069,13.075) 49.019,13.072 ccw(c49.069,13.069) 49.069,13.019 54.069,13.019 ccw(c54.069,13.069) 54.12,13.069 54.12,15.069 ccw(c54.069,15.069) 54.12,15.07 cw(c57.569,15.069) 57.569,18.519 cw(c57.569,15.064) 57.569,18.519 59.569,18.519 ccw(c59.569,18.569) 59.62,18.569 59.62,35.569 ccw(c59.569,35.569) 59.569,35.62 57.569,35.62 cw(c57.569,39.069) 54.12,39.069 ccw(c54.069,39.069) 54.12,39.069 54.12,41.069 ccw(c54.069,41.069) 54.069,41.12 45.257,41.12 45.257,44.3 48.653,44.3 ccw(c48.653,44.4) 48.754,44.4 48.754,65.4 ccw(c48.653,65.4) 48.653,65.5 40.653,65.5 ccw(c40.653,65.4) 40.553,65.4 40.553,44.4 ccw(c40.653,44.4) 40.653,44.3 44.05,44.3 44.05,41.123 3.577,41.123 ccw(c3.577,41.073) 3.526,41.073 3.526,39.096 ccw(c3.569,39.069) 3.519,39.069 cw(c0.069,39.069) 0.069,35.62 -2.181,35.62 ccw(c-2.181,35.569) -2.231,35.569 -2.231,3.5 ccw(c-2.181,3.5) -2.181,3.45 0,3.45 cw(c0,0) 3.45,0.001 ccw(c3.5,0) 3.45,0
GND on Bottom Layer "Top Layer-GND" (solid, remove dead copper, pour order 6): 3.45,-2.181 ccw(c3.5,-2.181) 3.518,-2.228 23.551,-2.228 ccw(c23.569,-2.181) 23.594,-2.225 ccw(c23.577,-2.177) 23.627,-2.177 ccw(c23.577,-2.177) 23.62,-2.151 23.62,5.069 cw(c31.569,5.069) 31.569,13.019 ccw(c31.569,13.069) 31.593,13.025 40.169,13.025 ccw(c40.169,13.075) 40.22,13.075 40.22,17.275 44.019,17.275 44.019,11.05 40.575,11.05 ccw(c40.575,11) 40.525,11 40.525,5.987 39.575,5.987 ccw(c39.575,5.936) 39.525,5.936 39.525,-1.45 ccw(c39.575,-1.45) 39.575,-1.5 49.971,-1.5 ccw(c49.971,-1.45) 50.022,-1.45 50.022,5.936 ccw(c49.971,5.936) 49.971,5.987 49.022,5.987 49.022,11 ccw(c48.971,11) 48.971,11.05 45.12,11.05 45.12,17.275 49.019,17.275 49.019,13.075 ccw(c49.069,13.075) 49.019,13.072 ccw(c49.069,13.069) 49.069,13.019 54.069,13.019 ccw(c54.069,13.069) 54.12,13.069 54.12,15.069 ccw(c54.069,15.069) 54.12,15.07 cw(c57.569,15.069) 57.569,18.519 cw(c57.569,15.064) 57.569,18.519 59.569,18.519 ccw(c59.569,18.569) 59.62,18.569 59.62,35.569 ccw(c59.569,35.569) 59.569,35.62 57.569,35.62 cw(c57.569,39.069) 54.12,39.069 ccw(c54.069,39.069) 54.12,39.069 54.12,41.069 ccw(c54.069,41.069) 54.069,41.12 45.257,41.12 45.257,44.3 48.653,44.3 ccw(c48.653,44.4) 48.754,44.4 48.754,65.4 ccw(c48.653,65.4) 48.653,65.5 40.653,65.5 ccw(c40.653,65.4) 40.553,65.4 40.553,44.4 ccw(c40.653,44.4) 40.653,44.3 44.05,44.3 44.05,41.123 3.577,41.123 ccw(c3.577,41.073) 3.526,41.073 3.526,39.096 ccw(c3.569,39.069) 3.519,39.069 cw(c0.069,39.069) 0.069,35.62 -2.181,35.62 ccw(c-2.181,35.569) -2.231,35.569 -2.231,3.5 ccw(c-2.181,3.5) -2.181,3.45 0,3.45 cw(c0,0) 3.45,0.001 ccw(c3.5,0) 3.45,0

## Keep-outs
Keep-Out Layer:
  lines w0.1: 3.5,-2.181 3.5,0 ccw(c0,0) 0,3.5 -2.181,3.5 -2.181,35.569 0.069,35.569 ccw(c0.069,39.069) 3.569,39.069 ; 3.508,-2.177 23.577,-2.177 ; 3.577,39.073 3.577,41.073 45.206,41.073 ; 23.571,2.391 25.52,2.391 25.52,5.838 26.52,5.838 35.52,5.838 36.52,5.838 46.52,5.838 46.529,5.838 46.529,2.258 49.17,2.258 ; 23.573,-2.177 23.573,1.285 ; 31.569,13.069 ccw(c31.569,5.069) 23.569,5.069 23.569,2.397 23.569,1.285 23.573,1.285 ; 31.575,13.075 40.169,13.075 40.169,19.2 49.069,19.2 49.069,17.319 49.069,17.325 49.069,13.075 ; 45.206,41.069 54.069,41.069 54.069,39.069 ccw(c57.569,39.069) 57.569,35.569 59.569,35.569 59.569,18.569 57.569,18.569 ccw(c57.569,15.069) 54.069,15.069 54.069,13.069 49.069,13.069 ; 46.517,1.218 49.17,1.218 49.17,-0.986 49.168,-0.986 49.168,-2.143 59.565,-2.143 59.565,-0.986 59.565,5.825 58.565,5.825 58.565,10.889 54.663,10.889 50.168,10.889 50.168,5.825 49.168,5.825 49.168,2.258 ; 46.52,1.218 46.52,-2.162 25.52,-2.162 25.52,1.285 23.573,1.285
  text ".Layer_Name" at 139.697,11.895 h3.05

## Other copper
Top Layer:
  pour cut-out: 39.37,-2.667 39.37,42.414 61.849,42.414 61.849,-2.667
  pour cut-out: 24.891,-3.644 24.89,-3.644 24.89,6.978 29.605,11.693 63.203,11.693 62.785,11.275 62.785,-3.346
  text ".Layer_Name" at 91.697,2.895 h3.05
Bottom Layer:
  pour cut-out: 39.37,-2.667 39.37,42.559 61.849,42.559 61.849,-2.667
  pour cut-out: 24.891,-3.644 24.89,-3.644 24.89,6.978 29.605,11.693 63.203,11.693 62.785,11.275 62.785,-3.346
  text ".Layer_Name" at 108.197,-0.105 h3.05
Multi-Layer:
  text ".Layer_Name" at 115.697,11.895 h3.05

## Silkscreen, mask and mechanical layers (free items; w line width, h text height)
Top Overlay:
  lines w0.2: 2.413,4.826 2.888,5.258 ; 5.207,22.987 5.558,22.671 ; 5.207,24.257 5.558,24.245 ; 8.382,20.193 10.922,19.558 ; 13.462,3.81 13.94,3.621 ; 16.54,0.57 17.272,-0.127 ; 17.145,19.177 17.508,19.747 ; 19.334,0.57 19.812,0.254
  text ".PCBIssueDate" at 59.2,19.2 h1 r90
  text ".ProjectNumber" at 50.6,13.4 h1 r90
  text ".PCBName" at 52.2,13.4 h1 r90
  text ".PCBVersionNumber" at 53.8,13.4 h1 r90
  text ".Layer_Name" at 91.697,5.895 h3.05
  text "SENSOR" at 35.82,1.491 h0.6 r270
Bottom Overlay:
  circle w0.2: c14.478,9.525 r5.334
  lines w0.2: 14.351,8.001 15.621,8.001
  text ".Layer_Name" at 108.197,-3.105 h3.05
Top Paste:
  text ".Layer_Name" at 115.697,5.895 h3.05
Bottom Paste:
  text ".Layer_Name" at 115.697,2.895 h3.05
Top Solder:
  text ".Layer_Name" at 115.697,-0.105 h3.05
Bottom Solder:
  text ".Layer_Name" at 115.697,-3.105 h3.05
Drill Guide:
  text ".Layer_Name" at 139.697,8.895 h3.05
Mechanical 1:
  lines w0.1: 3.5,-2.181 3.5,0 ccw(c0,0) 0,3.5 -2.181,3.5 -2.181,35.569 0.069,35.569 ccw(c0.069,39.069) 3.569,39.069 ; 3.508,-2.177 23.577,-2.177 ; 3.577,39.073 3.577,41.073 45.206,41.073 ; 23.569,2.397 23.569,5.069 cw(c31.569,5.069) 31.569,13.069 ; 23.571,2.391 25.52,2.391 25.52,5.838 26.52,5.838 35.52,5.838 36.52,5.838 46,5.838 46,2.258 46,-2.162 25.52,-2.162 25.52,1.285 23.573,1.285 23.573,-2.177 ; 31.575,13.075 40.169,13.075 40.169,19.2 49.069,19.2 49.069,17.319 49.069,17.325 49.069,13.075 ; 45.206,41.069 54.069,41.069 54.069,39.069 ccw(c57.569,39.069) 57.569,35.569 59.569,35.569 59.569,18.569 57.569,18.569 ccw(c57.569,15.069) 54.069,15.069 54.069,13.069 52.6,13.069 52.6,10.889 54.663,10.889 58.565,10.889 58.565,5.825 58.565,0.014 58.565,-2.143 50.2,-2.143 ; 49.069,13.069 51.6,13.069 51.6,10.889 50.168,10.889 50.168,5.825 50.168,-2.143
  text ".Layer_Name" at 91.697,11.895 h3.05
Mechanical 2:
  drawing of 289 lines, arcs and shapes, not listed
  text "Manufacturing Notes" at 96.197,109.395 h3.05
  text "Finished Board Thickness 1.6mm" at 96.197,104.895 h3.05
  text "Board to be FR4 Material" at 96.197,101.895 h3.05
  text "Board is 2 layer" at 96.197,98.895 h3.05
  text "Double sided resist in GREEN" at 96.197,95.895 h3.05
  text "2 Idents" at 96.197,92.895 h3.05
  text "Copper weight to be 1 oz finished" at 96.197,89.895 h3.05
  text "All Holes PTH" at 96.197,86.895 h3.05
  text "Please ignore all items outside MECH 1" at 96.197,83.895 h3.05
  text "Finish HASL Lead Free" at 96.197,80.895 h3.05
  text "Build notes" at 96.197,73.395 h3.05
  text "LED Cathodes are identified, assembler to refer" at 96.197,70.395 h3.05
  text "to part datasheet for correct orientation." at 96.197,67.395 h3.05
  text "Layout by:" at 97.697,49.395 h3.05
  text "Copyright 2014" at 130.697,47.895 h3.05
  text ".VariantName" at -7.6,47.6 h4
  text "Cubik Innovation" at 99.197,43.395 h3.05
  text "Bristol and Bath Science Park" at 99.197,40.395 h3.05
  text "Dirac Crescent" at 99.197,37.395 h3.05
  text "Bristol BS16 7FR" at 99.197,34.395 h3.05
  text "Tel: 0117 244 3000" at 99.197,25.395 h3.05
  text "Email: paul.mullen@cubik-innovation.co.uk" at 99.197,22.395 h3.05
  text "Layer" at 87.197,14.895 h3.05
  text ".Layer_Name" at 91.697,8.895 h3.05
  text "NO PIPS" at 36.6,8.2 h1
  text "NO PIPS" at 47,7.4 h1 r90
  text "NO PIPS" at 62.2,0.8 h1 r90
  text "NO PIPS" at 36.6,-5.6 h1
  text "Drawn by" at 88.697,-9.105 h3.05
  text ".PCBDrawnBy" at 114.697,-9.105 h3.05
  text "Date" at 88.697,-15.105 h3.05
  text ".PCBIssueDate" at 114.697,-15.105 h3.05
  text "Issue" at 88.697,-21.105 h3.05
  text ".PCBVersionNumber" at 114.697,-21.105 h3.05
  text "Document Name" at 88.697,-27.105 h3.05
  text ".Pcb_File_Name_No_Path" at 114.697,-27.105 h3.05
Mechanical 3:
  circle w0.254: c56.6,25.5 r2.6
  circle w0.254: c1.1,25.5 r2.6
  lines w0.1: -2,30 34,30 34,42 ; 40.1,17.3 40.1,23 48.9,23 48.9,17.2 ; 40.4,41.1 40.4,36.9 48.5,36.9 48.6,36.8 48.6,41
  lines w0.305: 39.497,41.148 39.497,42.418 39.624,42.291 62.484,42.291 62.484,12.192 39.497,12.192 39.497,41.529
  text "HEIGHT MAX 5mm" at 8,37 h1.52
  text "NO GP HERE" at 43.053,17.526 h1.52
Drill Drawing:
  text ".Layer_Name" at 115.697,8.895 h3.05

## Dimensions
54.069,41.069 to 58.565,-2.143 on Mechanical 2
-2.181,3.5 to 58.565,-2.143 on Mechanical 2

## Text inside footprints (layer, text, board x,y; h text height)
J2: Top Overlay "1" at 39.734,16.163 h2 r180